# EAGLE board word_clock (EAGLE 7.2.0)

Size 100 x 76.19 mm. Coordinates in mm from the lower left corner, seen from the top.
Outline: 0,0 100,0 100,76.19 0,76.19 0,0
Copper layers (1*16): Top 0.0356mm / dielectric 1.5011mm / Bottom 0.0356mm
Design rules "oshpark": minimum track width 6mil, minimum drill 13mil, track to track 6mil, track to pad 6mil, pad to pad 6mil, via to via 6mil, smd to smd 6mil, copper to edge 15mil, drill to drill 6mil, minimum pad ring 7mil, minimum via ring 7mil, stop-mask expansion 3mil, vias tented up to drill 0mil, thermal gap 10mil

## Footprints (pad centres in the part's own frame; a part is rotated, then mirrored left to right if it is on the bottom)
C050-025X075 = drill 0.813 octagon: 1 -2.54,0; 2 2.54,0
POWER_JACK_SLOT = drill 1 pad 2 long: GND@1 2.58,7.5; GND@2 7.58,10.8; PWR 2.58,13.8
SCREWTERMINAL-5MM-3 = drill 1.3 pad 2.413 square: 1 0,0 | drill 1.3 pad 2.413: 2 5,0; 3 10,0
TC26V = drill 0.813: 1 -1.27,0; 2 1.27,0
0207/10 = drill 0.813 octagon: 1 -5.08,0; 2 5.08,0
1X03 = drill 1.016 long: 1 -2.54,0; 2 0,0; 3 2.54,0
SHIFT_REGISTER = smd 1.18 x 0.58: P1 -2.7,3.9; P2 -2.7,2.6; P3 -2.7,1.3; P4 -2.7,0; P5 -2.7,-1.3; P6 -2.7,-2.6; P7 -2.7,-3.9; P8 2.7,-3.9; P9 2.7,-2.6; P10 2.7,-1.3; P11 2.7,0; P12 2.7,1.3; P13 2.7,2.6; P14 2.7,3.9
LDO = smd 1.27 x 6.35: P1 -2.54,-3.175; P2 0,-3.175; P3 2.54,-3.175 | smd 12.192 x 7.62: TAB 0,5.715
SOT23 = smd 1 x 1.4: 1 -0.95,-1.1; 2 0.95,-1.1; 3 0,1.1
MSP430 = drill 0.8: 1 -22.86,22.86; 2 -22.86,20.32; 3 -22.86,17.78; 4 -22.86,15.24; 5 -22.86,12.7; 6 -22.86,10.16; 7 -22.86,7.62; 8 -22.86,5.08; 9 -22.86,2.54; 10 -22.86,0; 11 22.86,0; 12 22.86,2.54; 13 22.86,5.08; 14 22.86,7.62; 15 22.86,10.16; 16 22.86,12.7; 17 22.86,15.24; 18 22.86,17.78; 19 22.86,20.32; 20 22.86,22.86
SOIC8 = smd 0.6 x 2.2: 1 -1.905,-2.6; 2 -0.635,-2.6; 3 0.635,-2.6; 4 1.905,-2.6; 5 1.905,2.6; 6 0.635,2.6; 7 -0.635,2.6; 8 -1.905,2.6
COIN_CELL_SPARKFUN = smd 17 x 17: CENTER 0,0 | smd 2.54 x 4.08: SIDE_1 -11.41,0; SIDE_2 11.43,0

## Placement (x,y rotation side)
C1  1u  [C050-025X075]  3.81,71.12 270 top
C2  4.7u  [C050-025X075]  10.16,68.58 180 top
C3  10u  [C050-025X075]  17.78,71.12 270 top
JP1  POWER_JACKSLT  [POWER_JACK_SLOT]  1.27,64.77 270 top
JP4  [SCREWTERMINAL-5MM-3]  58.42,3.81 0 top
JP5  [SCREWTERMINAL-5MM-3]  74.93,3.81 0 top
JP6  [SCREWTERMINAL-5MM-3]  96.52,3.81 90 top
JP7  [SCREWTERMINAL-5MM-3]  96.52,20.32 90 top
JP8  [SCREWTERMINAL-5MM-3]  96.52,36.83 90 top
JP9  [SCREWTERMINAL-5MM-3]  96.52,52.07 90 top
JP10  [SCREWTERMINAL-5MM-3]  41.91,3.81 0 top
Q1  32.768kHz  [TC26V]  40.64,50.8 90 top
R1  4.7k  [0207/10]  63.5,43.18 0 top
R2  4.7k  [0207/10]  63.5,38.1 0 top
R3  4.7k  [0207/10]  63.5,48.26 0 top
SERVO_1  [1X03]  78.74,73.66 0 top
SERVO_2  [1X03]  41.91,73.66 0 top
SR_1  SHIFT_REGISTER  [SHIFT_REGISTER]  44.45,36.83 90 top
SR_2  SHIFT_REGISTER  [SHIFT_REGISTER]  60.96,25.4 90 top
U$1  SHIFT_REGISTER  [SHIFT_REGISTER]  44.45,15.24 90 top
U$4  LDO  [LDO]  29.21,63.5 0 top
U$5  FET  [SOT23]  10.16,40.64 270 top
U$6  FET  [SOT23]  10.16,33.02 270 top
U$7  FET  [SOT23]  10.16,13.97 270 top
U$8  FET  [SOT23]  10.16,6.35 270 top
U$9  FET  [SOT23]  88.9,12.7 270 top
U$10  FET  [SOT23]  80.01,16.51 90 top
U$11  FET  [SOT23]  88.9,22.86 270 top
U$12  FET  [SOT23]  80.01,25.4 90 top
U$13  FET  [SOT23]  88.9,31.75 90 top
U$14  FET  [SOT23]  80.01,35.56 90 top
U$15  FET  [SOT23]  88.9,41.91 90 top
U$16  FET  [SOT23]  80.01,45.72 90 top
U$17  FET  [SOT23]  88.9,50.8 90 top
U$18  FET  [SOT23]  80.01,53.34 90 top
U$19  FET  [SOT23]  88.9,59.69 90 top
U$20  FET  [SOT23]  80.01,63.5 90 top
U$21  FET  [SOT23]  88.9,68.58 90 top
U$22  FET  [SOT23]  22.86,6.35 270 top
U$23  FET  [SOT23]  22.86,13.97 270 top
U$24  FET  [SOT23]  22.86,33.02 270 top
U$25  MSP430  [MSP430]  25.4,25.4 90 top
U$26  RTC  [SOIC8]  48.26,49.53 270 top
U$27  FET  [SOT23]  22.86,40.64 270 top
U$28  COIN_CELL_SPARKFUN  [COIN_CELL_SPARKFUN]  60.96,66.04 0 top

## Library data of the parts
C1-C3 R1-R3 = rcl
JP1 = SparkFun-Connectors; PROD_ID: PRT-00119
JP4-JP10 = SparkFun-Connectors; STOREFRONT_ID: PRT-08433
Q1 = crystal; OC_FARNELL: unknown; OC_NEWARK: unknown
SERVO_1 SERVO_2 = pinhead
SR_1 SR_2 U$1 U$4-U$27 = word_clock
U$28 = eoh

## Nets
3.3V: C1.1 C3.1 R1.2 R2.2 R3.2 SR_1.P1 SR_1.P9 SR_1.P14 SR_2.P1 SR_2.P9 SR_2.P14 U$1.P1 U$1.P9 U$1.P14 U$4.P2 U$25.1 U$26.8
EIGHT: U$1.P4 U$20.1
EIGHT_LED: JP9.2 U$20.3
ELEVEN: U$1.P10 U$23.1
ELEVEN_LED: JP10.2 U$23.3
FIVE_HR: SR_2.P11 U$17.1
FIVE_HR_LED: JP8.2 U$17.3
FIVE_MIN: SR_1.P4 U$6.1
FIVE_MIN_LED: JP4.3 U$6.3
FOUR: SR_2.P10 U$16.1
FOUR_LED: JP8.1 U$16.3
GND: C1.2 C2.2 C3.2 JP1.GND@1 JP1.GND@2 SERVO_1.3 SERVO_2.3 SR_1.P7 SR_2.P7 U$1.P7 U$4.P1 U$4.TAB U$5.2 U$6.2 U$7.2 U$8.2 U$9.2 U$10.2 U$11.2 U$12.2 U$13.2 U$14.2 U$15.2 U$16.2 U$17.2 U$18.2 U$19.2 U$20.2 U$21.2 U$22.2 U$23.2 U$24.2 U$25.20 U$26.4 U$27.2 U$28.CENTER
HALF: SR_1.P11 U$10.1
HALF_LED: JP6.1 U$10.3
IRQ: R3.1 U$26.7
IT_IS: SR_1.P3 U$5.1
IT_IS_LED: JP4.1 U$5.3
N$1: Q1.1 U$26.2
N$2: Q1.2 U$26.1
N$4: SR_1.P13 SR_2.P2
N$5: SR_2.P13 U$1.P2
N$7: U$1.P13
NINE: U$1.P5 U$21.1
NINE_LED: JP9.3 U$21.3
OCLK: U$1.P12 U$27.1
OCLK_LED: JP4.2 U$27.3
ONE: SR_2.P4 U$13.1
ONE_LED: JP7.1 U$13.3
PAST: SR_1.P12 U$11.1
PAST_LED: JP6.2 U$11.3
QUARTER: SR_1.P6 U$8.1
QUARTER_LED: JP5.2 U$8.3
RTC_SCL: R1.1 U$25.14 U$26.6
RTC_SDA: R2.1 U$25.15 U$26.5
SERVO_1: SERVO_1.2 U$25.10
SERVO_2: SERVO_2.2 U$25.12
SEVEN: U$1.P3 U$19.1
SEVEN_LED: JP9.1 U$19.3
SIX: SR_2.P12 U$18.1
SIX_LED: JP8.3 U$18.3
SR_CLK: SR_1.P8 SR_2.P8 U$1.P8 U$25.2
SR_DATA: SR_1.P2 U$25.3
TEN_HR: U$1.P6 U$22.1
TEN_HR_LED: JP10.1 U$22.3
TEN_MIN: SR_1.P5 U$7.1
TEN_MIN_LED: JP5.1 U$7.3
THREE: SR_2.P6 U$15.1
THREE_LED: JP7.3 U$15.3
TO: SR_2.P3 U$12.1
TO_LED: JP6.3 U$12.3
TWELVE: U$1.P11 U$24.1
TWELVE_LED: JP10.3 U$24.3
TWENTY: SR_1.P10 U$9.1
TWENTY_LED: JP5.3 U$9.3
TWO: SR_2.P5 U$14.1
TWO_LED: JP7.2 U$14.3
VBACK: U$26.3 U$28.SIDE_1 U$28.SIDE_2
VCC_5: C2.1 JP1.PWR SERVO_1.1 SERVO_2.1 U$4.P3

## Tracks (layer width: path | path; a pad name or v marks a point on that pad's centre or on a via)
3.3V  (16 unrouted)
EIGHT  (1 unrouted)
EIGHT_LED  (1 unrouted)
ELEVEN  (1 unrouted)
ELEVEN_LED  (1 unrouted)
FIVE_HR  (1 unrouted)
FIVE_HR_LED  (1 unrouted)
FIVE_MIN  (1 unrouted)
FIVE_MIN_LED  (1 unrouted)
FOUR  (1 unrouted)
FOUR_LED  (1 unrouted)
GND  (35 unrouted)
HALF  (1 unrouted)
HALF_LED  (1 unrouted)
IRQ  (1 unrouted)
IT_IS  (1 unrouted)
IT_IS_LED  (1 unrouted)
N$1  (1 unrouted)
N$2  (1 unrouted)
N$4  (1 unrouted)
N$5  (1 unrouted)
NINE  (1 unrouted)
NINE_LED  (1 unrouted)
OCLK  (1 unrouted)
OCLK_LED  (1 unrouted)
ONE  (1 unrouted)
ONE_LED  (1 unrouted)
PAST  (1 unrouted)
PAST_LED  (1 unrouted)
QUARTER  (1 unrouted)
QUARTER_LED  (1 unrouted)
RTC_SCL  (2 unrouted)
RTC_SDA  (2 unrouted)
SERVO_1  (1 unrouted)
SERVO_2  (1 unrouted)
SEVEN  (1 unrouted)
SEVEN_LED  (1 unrouted)
SIX  (1 unrouted)
SIX_LED  (1 unrouted)
SR_CLK  (3 unrouted)
SR_DATA  (1 unrouted)
TEN_HR  (1 unrouted)
TEN_HR_LED  (1 unrouted)
TEN_MIN  (1 unrouted)
TEN_MIN_LED  (1 unrouted)
THREE  (1 unrouted)
THREE_LED  (1 unrouted)
TO  (1 unrouted)
TO_LED  (1 unrouted)
TWELVE  (1 unrouted)
TWELVE_LED  (1 unrouted)
TWENTY  (1 unrouted)
TWENTY_LED  (1 unrouted)
TWO  (1 unrouted)
TWO_LED  (1 unrouted)
VBACK  (2 unrouted)
VCC_5  (4 unrouted)